# EAGLE board xmega (EAGLE 5.11)
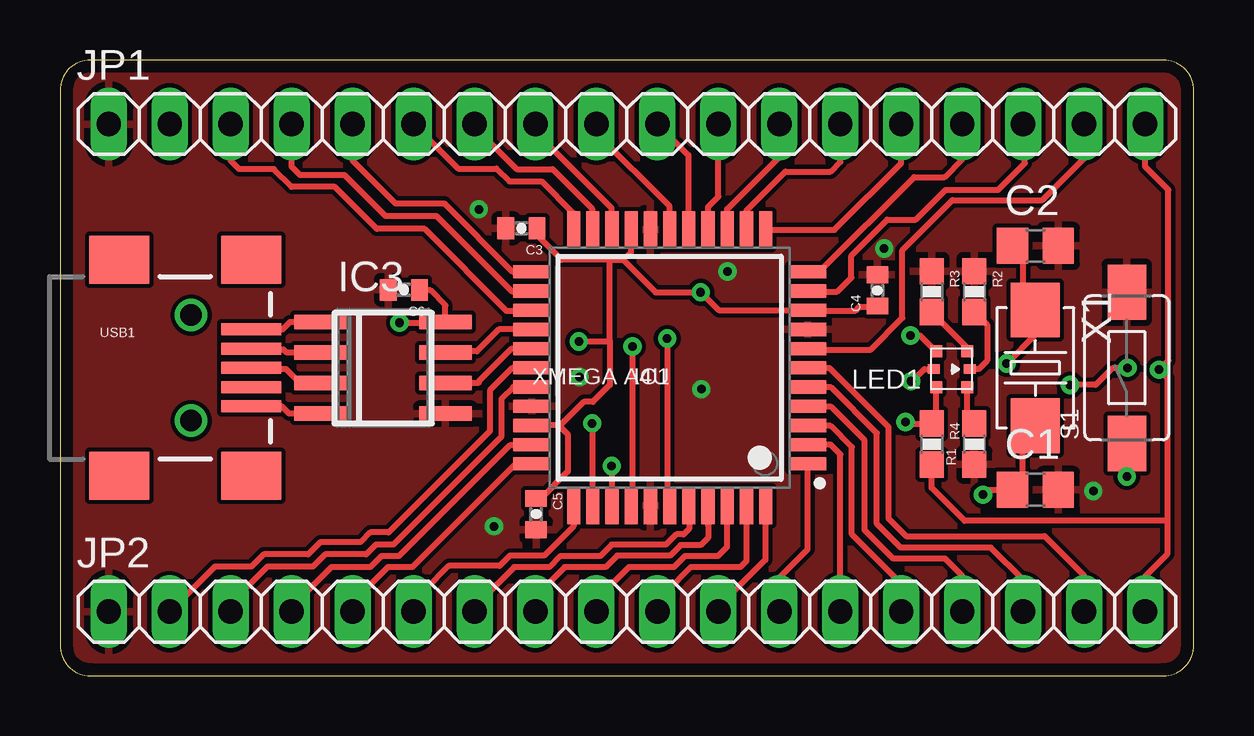
[diagram p0: board, top side]
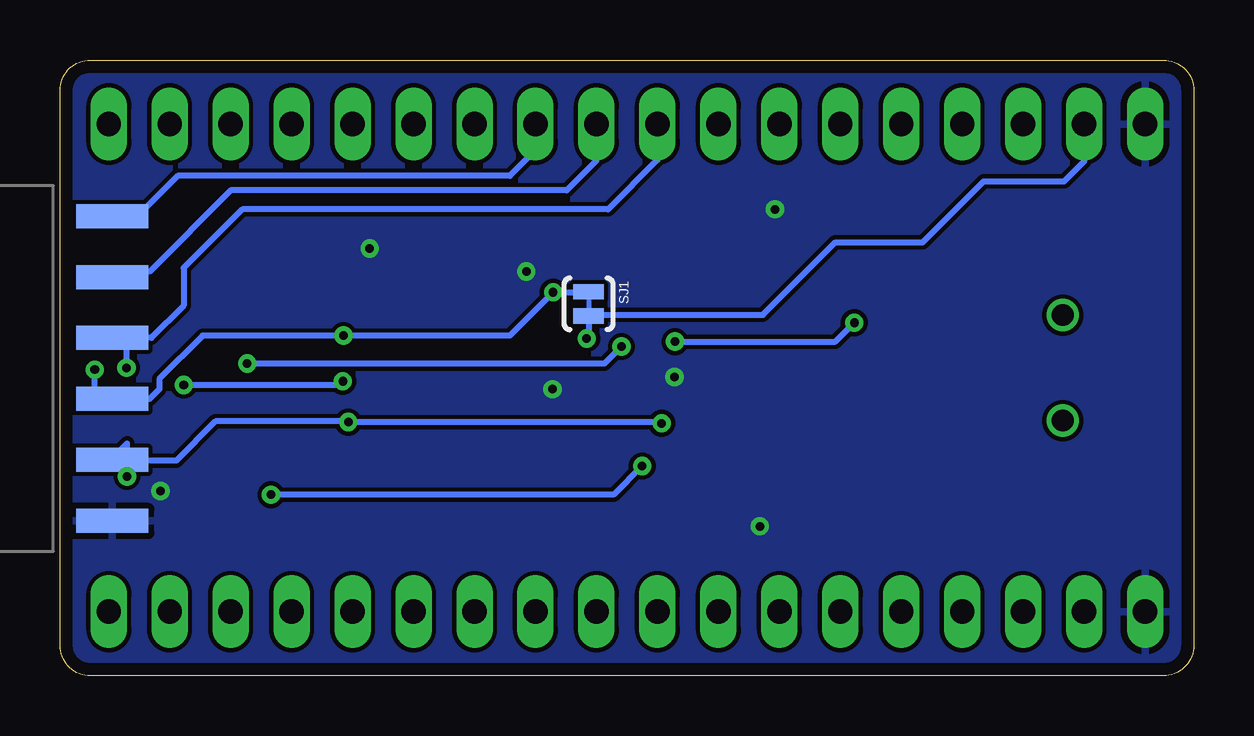
[diagram p1: board, bottom side, seen from below]

Size 47.24 x 25.65 mm. Coordinates in mm from the lower left corner, seen from the top.
Outline: 45.97,0 arc90 47.24,1.27 47.24,24.38 arc90 45.97,25.65 1.27,25.65 arc90 0,24.38 0,1.27 arc90 1.27,0 45.97,0
Copper layers (1*16): Top 0.0356mm / dielectric 1.5011mm / Bottom 0.0356mm
Design rules "SilverCircuits-tented": minimum track width 7mil, minimum drill 14mil, track to track 7mil, track to pad 7mil, pad to pad 7mil, via to via 7mil, smd to smd 0mil, copper to edge 20mil, drill to drill 8mil, minimum pad ring 0mil, minimum via ring 8mil, stop-mask expansion 4mil, vias tented up to drill 14mil, thermal gap 10mil

## Footprints (pad centres in the part's own frame; a part is rotated, then mirrored left to right if it is on the bottom)
C0805 = smd 1.3 x 1.5: 1 -0.95,0; 2 0.95,0
0402-CAP = smd 0.7 x 0.9: 1 -0.65,0; 2 0.65,0
QFP80P1200X1200X120-44N = smd 1.55 x 0.55: 1 -5.75,4; 2 -5.75,3.2; 3 -5.75,2.4; 4 -5.75,1.6; 5 -5.75,0.8; 6 -5.75,0; 7 -5.75,-0.8; 8 -5.75,-1.6; 9 -5.75,-2.4; 10 -5.75,-3.2; 11 -5.75,-4; 23 5.75,-4; 24 5.75,-3.2; 25 5.75,-2.4; 26 5.75,-1.6; 27 5.75,-0.8; 28 5.75,0; 29 5.75,0.8; 30 5.75,1.6; 31 5.75,2.4; 32 5.75,3.2; 33 5.75,4 | smd 0.55 x 1.55: 12 -4,-5.75; 13 -3.2,-5.75; 14 -2.4,-5.75; 15 -1.6,-5.75; 16 -0.8,-5.75; 17 0,-5.75; 18 0.8,-5.75; 19 1.6,-5.75; 20 2.4,-5.75; 21 3.2,-5.75; 22 4,-5.75; 34 4,5.75; 35 3.2,5.75; 36 2.4,5.75; 37 1.6,5.75; 38 0.8,5.75; 39 0,5.75; 40 -0.8,5.75; 41 -1.6,5.75; 42 -2.4,5.75; 43 -3.2,5.75; 44 -4,5.75
SO08 = smd 0.6 x 2.2: 1 -1.905,-2.6; 2 -0.635,-2.6; 3 0.635,-2.6; 4 1.905,-2.6; 5 1.905,2.6; 6 0.635,2.6; 7 -0.635,2.6; 8 -1.905,2.6
1X18 = drill 1.016 long: 1 -21.59,0; 2 -19.05,0; 3 -16.51,0; 4 -13.97,0; 5 -11.43,0; 6 -8.89,0; 7 -6.35,0; 8 -3.81,0; 9 -1.27,0; 10 1.27,0; 11 3.81,0; 12 6.35,0; 13 8.89,0; 14 11.43,0; 15 13.97,0; 16 16.51,0; 17 19.05,0; 18 21.59,0
1X06-SMD_EDGE = smd 1 x 3: 1 0,-0.08; 2 2.54,-0.08; 3 5.08,-0.08; 4 7.62,-0.08; 5 10.16,-0.08; 6 12.7,-0.08
0606_LED = smd 0.5 x 0.5: P$1 -0.75,-0.65; P$3 0.75,-0.65; P$4 0.75,0.65; P$6 -0.75,0.65 | smd 0.4 x 0.5: P$2 0,-0.75; P$5 0,0.75
0603-RES = smd 1.1 x 1: 1 -0.85,0; 2 0.85,0
TACTILE-SWITCH-1101NE = smd 2.3 x 1.6: P$1 -3.15,0; P$2 3.15,0
SJ_2S-TRACE = smd 0.635 x 1.27: 1 -0.508,0; 2 0.508,0
USB-MINIB-NOSTOP = smd 2.5 x 0.5: D+ 2.5,0; D- 2.5,0.8; GND 2.5,-1.6; ID 2.5,-0.8; VBUS 2.5,1.6 | smd 2.5 x 2: G1 -3,-4.5; G2 -3,4.5; G3 2.5,4.5; G4 2.5,-4.5 | drill 0.9 pad 0.8 round: H1 0,2.2 | drill 0.9 pad 0.787 round: H2 0,-2.2
5032 = smd 2.286 x 2.032: 1 -2.413,0; 2 2.413,0

## Placement (x,y rotation side)
C1  [C0805]  40.64,7.75 0 top
C2  [C0805]  40.64,17.91 0 top
C3  [0402-CAP]  19.23,18.64 180 top
C4  [0402-CAP]  34.06,16.05 90 top
C5  [0402-CAP]  19.84,6.73 270 top
C6  [0402-CAP]  14.33,16.08 180 top
IC1  XMEGA A4U  [QFP80P1200X1200X120-44N]  25.4,12.83 180 top
IC3  USB6B1  [SO08]  13.46,12.83 270 top
JP1  [1X18]  23.62,22.99 0 top
JP2  [1X18]  23.62,2.67 0 top
JP5  [1X06-SMD_EDGE]  44.98,19.15 270 bottom
LED1  0606_RGB_LED  [0606_LED]  37.16,12.78 90 top
R1  1k  [0603-RES]  38.1,9.65 90 top
R2  1k  [0603-RES]  38.1,16 270 top
R3  1k  [0603-RES]  36.32,16 270 top
R4  [0603-RES]  36.32,9.65 270 top
S1  SWITCH-MOMENTARY-2-SMD-1101NE  [TACTILE-SWITCH-1101NE]  44.45,12.83 90 top
SJ1  SOLDERJUMPERTRACE  [SJ_2S-TRACE]  25.22,15.49 270 bottom
USB1  USB-SMD-NS  [USB-MINIB-NOSTOP]  5.46,12.83 0 top
X1  [5032]  40.64,12.83 270 top

## Library data of the parts
C1 C2 = rcl
C3-C6 JP5 R1-R4 SJ1 USB1 = SparkFun
IC1 = xmega-a4
IC3 = st-microelectronics; MPN: USB6B1; OC_FARNELL: 9804358; OC_NEWARK: 26M4750
JP1 JP2 = pinhead
LED1 = lil_rgb
S1 = NSL_RFIDdle
X1 = NSL_MiniQuad

## Nets
AVCC: IC1.39 JP1.2 SJ1.2
D+: IC3.3 USB1.D+
D-: IC3.2 USB1.D-
GND: C1.2 C2.2 C3.2 C4.2 C5.2 C6.2 IC1.8 IC1.18 IC1.30 IC1.38 IC3.5 JP1.1 JP2.1 JP5.6 R1.1 R2.1 R3.1 S1.P$2
IO1: IC1.26 IC3.7
IO2: IC1.27 IC3.6
MISO: IC1.16 JP1.10 JP5.2
MOSI: IC1.15 JP1.11 JP5.1
N$1: LED1.P$1 R1.2
N$2: LED1.P$2 R2.2
N$4: LED1.P$3 R3.2
N$7: C1.1 IC1.36 X1.2
N$8: C2.1 IC1.37 X1.1
PA0: IC1.40 JP2.7
PA1: IC1.41 JP2.8
PA2: IC1.42 JP2.9
PA3: IC1.43 JP2.10
PA4: IC1.44 JP2.11
PA5: IC1.1 JP2.12
PA6: IC1.2 JP2.13
PA7: IC1.3 JP2.14
PB0: IC1.4 JP2.15
PB1: IC1.5 JP2.16
PB2: IC1.6 JP2.17
PB3: IC1.7 JP1.17
PC0: IC1.10 JP1.16
PC1: IC1.11 JP1.15
PC2: IC1.12 JP1.14
PC3: IC1.13 JP1.13
PC4: IC1.14 JP1.12
PD0: IC1.20 JP1.8
PD1: IC1.21 JP1.7
PD2: IC1.22 JP1.6
PD3: IC1.23 JP1.5
PD4: IC1.24 JP1.4
PD5: IC1.25 JP1.3
PDI-DATA: IC1.34 JP2.6
PE0: IC1.28 JP2.2
PE1: IC1.29 JP2.3
PE2: IC1.32 JP2.4
PE3: IC1.33 JP2.5
RST: IC1.35 JP5.5 LED1.P$6 R4.1 S1.P$1
SCK: IC1.17 JP1.9 JP5.3 LED1.P$5
USB_GND: IC3.4 USB1.GND
VBUS: IC3.1 USB1.VBUS
VCC: C3.1 C4.1 C5.1 C6.1 IC1.9 IC1.19 IC1.31 IC3.8 JP1.18 JP2.18 JP5.4 LED1.P$4 R4.2 SJ1.1

## Tracks (layer width: path | path; a pad name or v marks a point on that pad's centre or on a via)
AVCC  (via drill 0.36)
  Top 0.254: IC1.39 25.3,7.18 v25.3,14.05
  Bottom 0.254: v25.3,14.05 25.22,14.12 SJ1.2 25.17,15.04 17.96,15.04 14.94,18.06 11.3,18.06 8.76,20.6 5.41,20.6 4.55,21.46 4.55,22.96 JP1.2
D+
  Top 0.254: USB1.D+ 8.01,12.88 8.11,12.78 9.42,12.78 10.01,12.19 IC3.3
D-
  Top 0.254: 7.97,13.64 USB1.D- 8,13.59 9.32,13.59 9.45,13.46 IC3.2
GND  (via drill 0.36)
  other vias: 34.34,17.81 17.45,19.43 18.08,6.22 21.64,12.45 26.72,11.94 27.81,16.84 43.05,7.7
  pour Top: -0.81,28.4 48.01,28.4 48.18,-2.77 -0.64,-2.77 -0.74,26.34 arc1 -0.74,26.35
  pour Bottom: -0.79,28.47 48.03,28.47 48.08,-2.79 -0.74,-2.79 -0.86,26.62
IO1
  Top 0.254: IC3.7 16.11,13.51 17.37,13.51 18.29,14.43 IC1.26
IO2
  Top 0.254: IC1.27 19.64,13.61 18.8,13.61 17.45,12.27 17.45,12.22 17.42,12.19 IC3.6
MISO
  Top 0.254: IC1.16 26.19,18.59 26.19,21.69 JP1.10
  Bottom 0.254: JP5.2 44.84,16.84 43.51,16.84 40.13,20.22 26.14,20.22 24.89,21.46 JP1.10
MOSI
  Top 0.254: IC1.15 | IC1.15 27,19.53 27.43,19.96 JP1.11
  Bottom 0.254: JP5.1 44.76,19.46 43.71,19.46 42.34,20.83 28.5,20.83 27.43,21.89 JP1.11
N$1
  Top 0.254: R1.2 37.81,10.79 LED1.P$1
N$2
  Top 0.254: R2.2 38.63,14.62 38.63,13.13 38.28,12.78 LED1.P$2
N$4
  Top 0.254: R3.2 37.81,13.66 LED1.P$3
N$7  (via drill 0.36)
  Top 0.254: IC1.36 22.99,7.09 v22.99,8.74 | v38.46,7.54 38.66,7.75 C1.1 39.69,7.89 40.11,8.31 40.11,9.88 X1.2
  Bottom 0.254: v22.99,8.74 24.18,7.54 v38.46,7.54
N$8  (via drill 0.36)
  Top 0.254: IC1.37 23.85,7.13 v23.85,13.72 | C2.1 39.83,17.91 40.13,17.6 40.13,15.75 X1.1 40.64,14.2 v39.45,13.01
  Bottom 0.254: v23.85,13.72 24.56,13.01 v39.45,13.01
PA0
  Top 0.254: IC1.40 26.21,7.06 26.21,6.12 25.98,5.89 25.68,5.89 25.25,5.46 22.99,5.46 22.5,4.98 20.85,4.98 20.4,4.52 18.92,4.52 17.27,2.87 JP2.7
PA1
  Top 0.254: IC1.41 27,6.25 27,5.74 26.7,5.44 25.86,5.44 25.43,5 23.22,5 22.73,4.52 21.03,4.52 19.81,3.3 JP2.8
PA2
  Top 0.254: IC1.42 27.79,7.07 27.79,5.36 27.41,4.98 26.04,4.98 25.58,4.52 23.7,4.52 22.66,3.48 22.66,2.97 JP2.9
PA3
  Top 0.254: IC1.43 28.6,4.78 28.35,4.52 26.29,4.52 25.27,3.51 25.27,3.25 24.89,2.87 JP2.10
PA4
  Top 0.254: IC1.44 29.4,6.29 29.39,6.27 29.39,4.83 27.89,3.33 27.89,3.12 JP2.11
PA5
  Top 0.254: IC1.1 31.15,5.27 30.02,4.14 30.02,2.72 JP2.12
PA6
  Top 0.254: IC1.2 32.11,9.63 32.51,9.22 JP2.13
PA7
  Top 0.254: IC1.3 31.16,10.41 32.11,10.41 32.99,9.53 32.99,5.89 35.05,3.83 JP2.14
PB0
  Top 0.254: IC1.4 31.18,11.2 32.13,11.2 33.53,9.8 33.53,6.07 34.72,4.88 36.88,4.88 37.59,4.17 JP2.15
PB1
  Top 0.254: IC1.5 31.16,12.01 32.13,12.01 34.04,10.11 34.04,6.33 35.03,5.33 38.79,5.33 40.13,3.99 JP2.16
PB2
  Top 0.254: IC1.6 32.05,12.83 34.52,10.36 34.52,6.55 35.25,5.82 41.02,5.82 42.67,4.17 JP2.17
PB3
  Top 0.254: IC1.7 31.19,13.59 33.78,13.59 35.1,14.91 35.1,17.73 37.19,19.81 40.92,19.81 42.67,21.56 JP1.17
PC0
  Top 0.254: IC1.10 31.18,16 32.38,16 32.97,16.59 32.97,17.5 34.47,19 35.66,19 36.91,20.24 39.09,20.24 40.21,21.36 40.21,22.91 JP1.16
PC1
  Top 0.254: IC1.11 31.63,16.83 35.59,20.78 36.86,20.78 37.59,21.51 JP1.15
PC2
  Top 0.254: IC1.12 32.27,18.58 35.05,21.36 JP1.14
PC3
  Top 0.254: IC1.13 28.6,19.38 30.23,21.01 32.11,21.01 32.51,21.41 JP1.13
PC4
  Top 0.254: JP1.12 29.95,22.96 29.95,21.59 27.8,19.44 IC1.14
PD0
  Top 0.254: IC1.20 22.99,18.59 22.99,19.48 19.81,22.66 JP1.8
PD1
  Top 0.254: IC1.21 22.17,18.6 22.17,19.46 20.52,21.11 19.02,21.11 17.27,22.86 JP1.7
PD2
  Top 0.254: IC1.22 21.39,18.59 21.39,19.28 20.07,20.6 18.72,20.6 18.19,21.13 16.59,21.13 JP1.6
PD3
  Top 0.254: IC1.23 19.64,16.84 18.85,16.84 16,19.68 13.97,19.68 12.19,21.46 JP1.5
PD4
  Top 0.254: IC1.24 19.62,16 18.85,16 15.7,19.15 13.56,19.15 11.86,20.85 10.01,20.85 9.65,21.21 JP1.4
PD5
  Top 0.254: IC1.25 19.61,15.19 18.62,15.19 15.19,18.62 13.21,18.62 11.46,20.37 9.65,20.37 8.91,21.11 7.47,21.11 7.11,21.46 JP1.3
PDI-DATA
  Top 0.254: JP2.6 15.21,3.15 15.21,3.58 16.2,4.57 18.31,4.57 18.75,5 20.17,5 21.4,6.24 IC1.34
PE0
  Top 0.254: JP2.2 6.45,4.55 7.98,4.55 8.48,5.05 10.34,5.05 10.85,5.56 12.52,5.56 12.93,5.97 13.69,5.97 17.91,10.19 17.91,11.89 18.85,12.83 IC1.28
PE1
  Top 0.254: 19.64,12.01 IC1.29 18.88,12.03 18.39,11.53 18.39,9.96 13.89,5.46 13.16,5.46 12.75,5.05 11.05,5.05 10.54,4.55 8.64,4.55 7.11,3.02 JP2.3
PE2
  Top 0.254: IC1.32 19.62,9.6 18.75,9.6 14.12,4.98 13.39,4.98 12.93,4.52 11.3,4.52 9.65,2.87 JP2.4
PE3
  Top 0.254: IC1.33 19.64,8.84 19,8.84 14.68,4.52 13.66,4.52 12.19,3.05 JP2.5
RST  (via drill 0.36)
  Top 0.254: IC1.35 22.17,7.1 v22.17,10.52 | v35.23,10.57 35.29,10.5 R4.1 36.51,10.69 LED1.P$6 | v44.45,8.31 S1.P$1
  Bottom 0.254: v22.17,10.52 22.23,10.57 v35.23,10.57 35.25,10.59 40.77,10.59 42.39,8.97 44.45,8.97 | JP5.5 45.06,9.06 S1.P$1 44.45,8.97 | 44.45,8.97 v44.45,8.31
SCK  (via drill 0.36)
  Top 0.254: LED1.P$5 36.02,12.78 35.51,12.27 v35.46,12.27 | v42.09,12.12 43.16,12.12 43.84,12.8 44.45,12.8 v44.48,12.83 | IC1.17 25.4,19.56 22.35,22.61 JP1.9
  Bottom 0.254: 44.48,14.07 JP5.3 | v35.46,12.27 35.61,12.12 v42.09,12.12 | 44.48,14.07 v44.48,12.83 | JP1.9 22.35,21.49 24.41,19.43 39.65,19.43 42.09,16.99 42.09,15.42 43.43,14.07 44.48,14.07
USB_GND
  Top 0.254: USB1.GND | USB1.GND 9.25,11.23 9.55,10.92 IC3.4
VBUS
  Top 0.254: USB1.VBUS 7.99,14.45 8.01,14.43 9.27,14.43 9.58,14.73 IC3.1
VCC  (via drill 0.36)
  Top 0.254: IC1.31 19.66,10.44 20.78,10.44 | 20.78,10.44 21.16,10.06 21.16,8.51 20.03,7.38 C5.1 | IC1.19 | IC1.19 23.8,17.65 23.47,17.32 | 22.91,17.32 20.9,17.32 19.88,18.35 C3.1 | 22.91,17.32 23.47,17.32 | 23.47,17.32 24.82,15.98 v26.7,15.98 27.45,15.23 IC1.9 31.16,15.21 33.15,15.21 33.3,15.37 34.03,15.37 | 20.78,10.44 20.85,10.44 21.82,11.4 22.2,11.4 22.91,12.12 22.91,13.95 | 22.91,13.95 22.91,17.32 | LED1.P$4 36.49,13.53 35.84,14.17 v35.43,14.17 | JP1.18 45.21,21.21 46.18,20.24 46.18,13.13 v45.8,12.75 46.13,12.42 46.13,6.45 | JP2.18 45.21,4.14 46.13,5.05 46.13,6.45 | R4.2 36.32,7.82 37.69,6.45 46.13,6.45 | C6.1 15,16.05 15.44,16.05 16.06,15.43 IC3.8 16.04,14.71 v14.15,14.71 | v21.61,13.92 21.64,13.95 22.91,13.95
  Top 0.406: 34.03,15.37 C4.1
  Bottom 0.254: SJ1.1 25.25,15.98 v26.7,15.98 28.5,14.17 v35.43,14.17 41.3,14.17 43.1,12.37 43.1,11.94 43.51,11.53 JP5.4 45.09,11.51 45.9,11.51 45.8,11.61 v45.8,12.75 | v14.15,14.71 14.94,13.92 v21.61,13.92